# EAGLE board mach da di day (EAGLE 5.10)
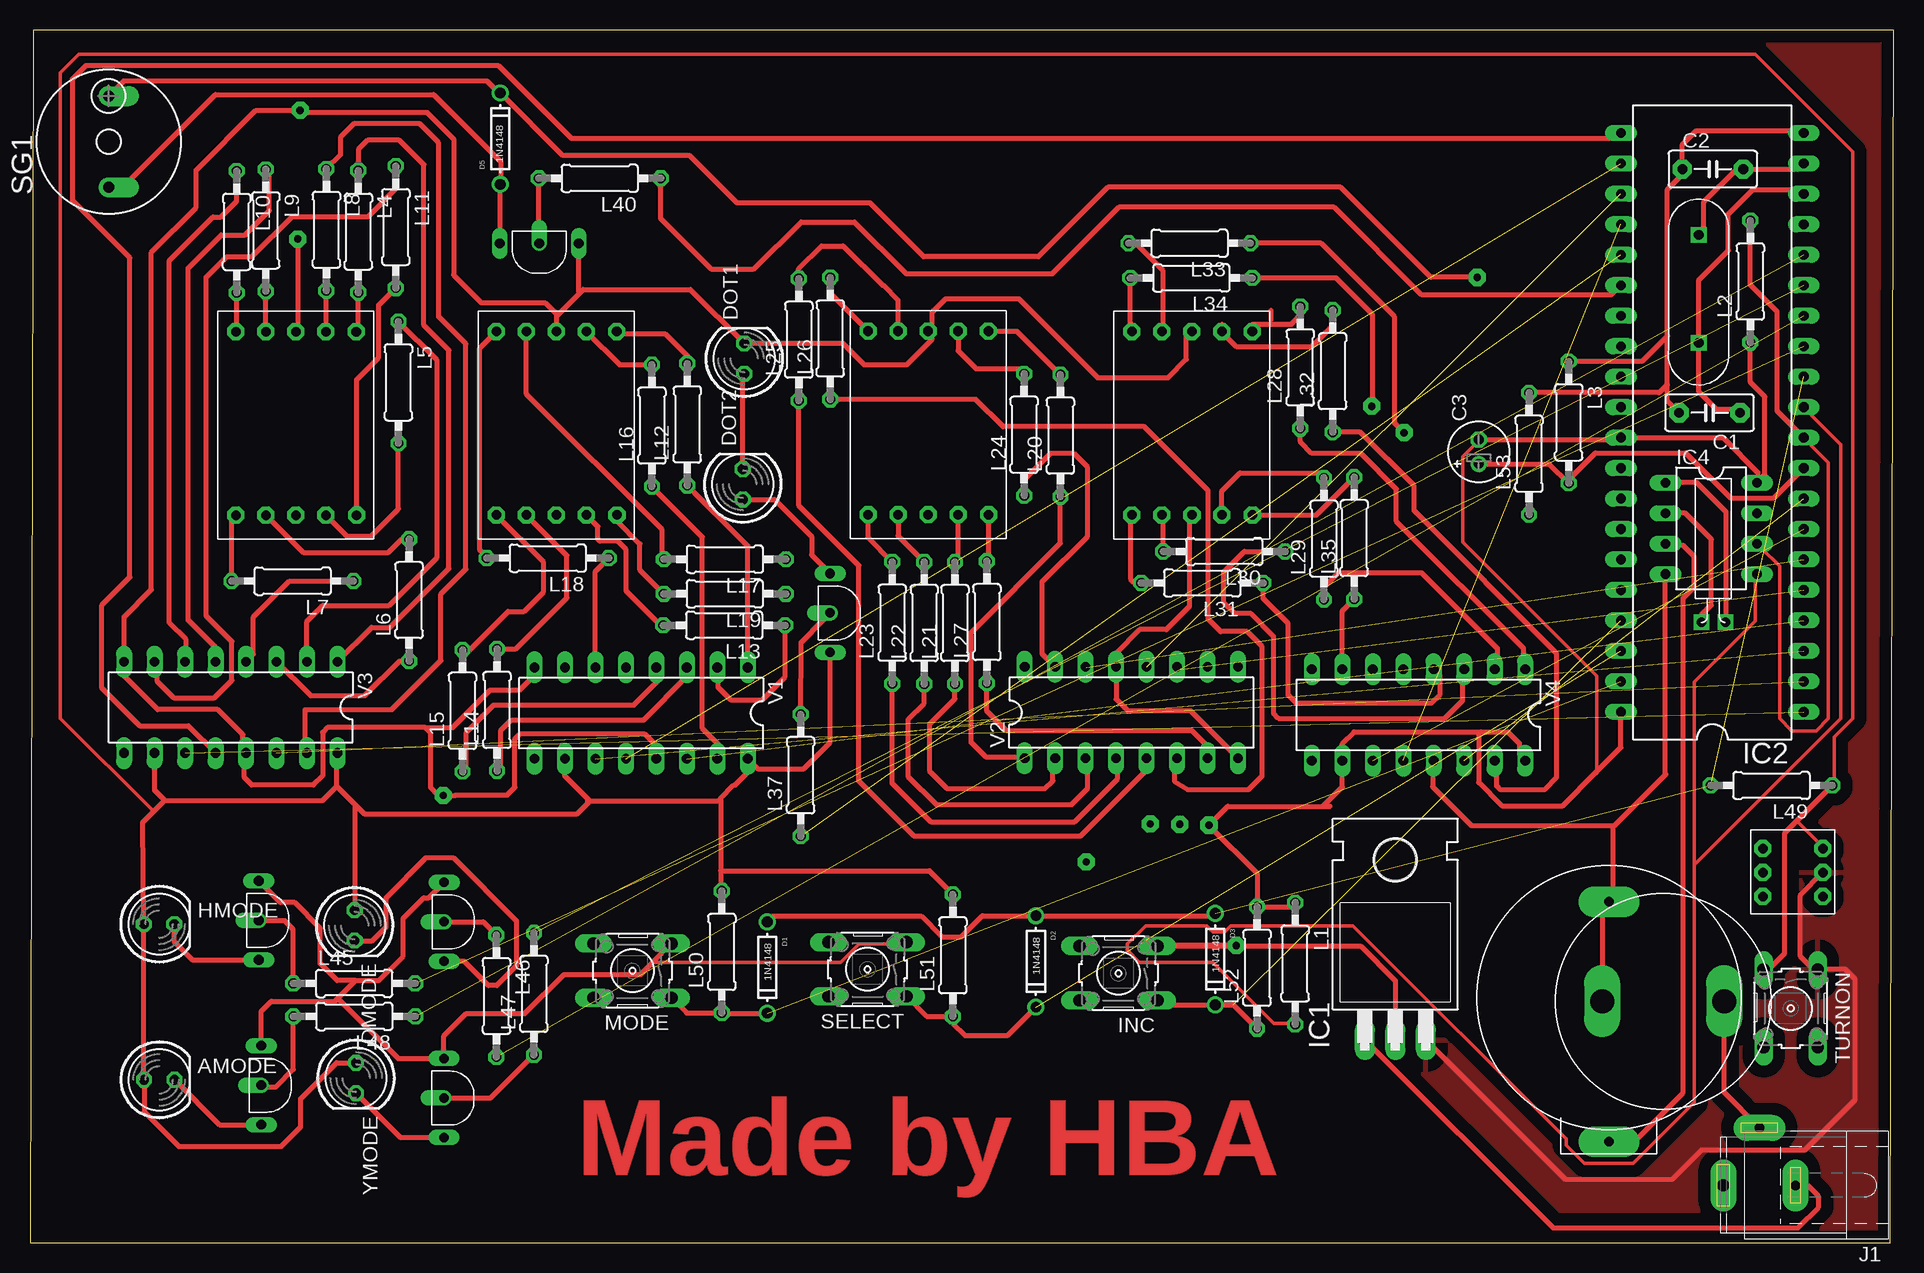
[diagram p0: board, top side]
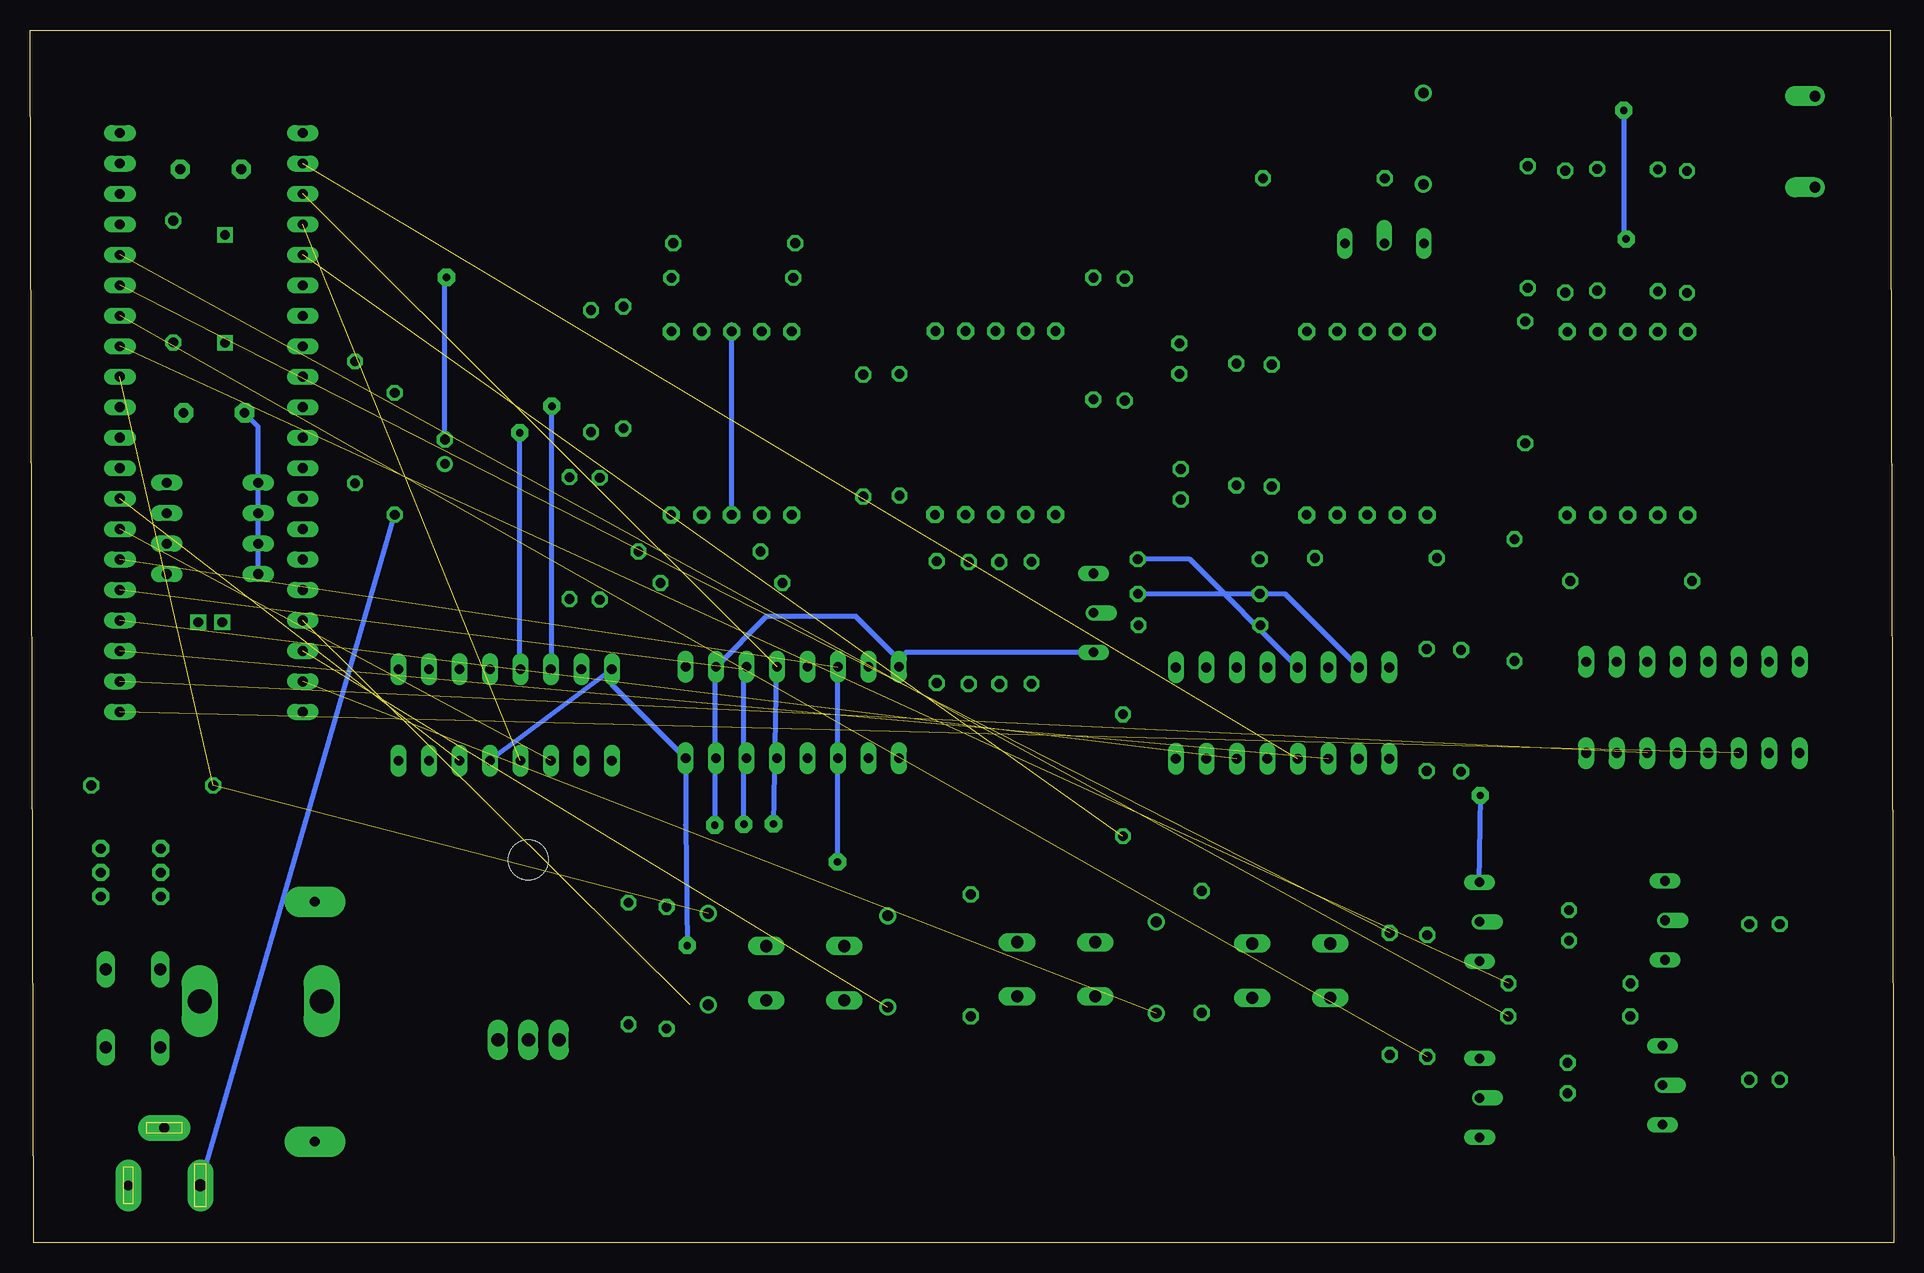
[diagram p1: board, bottom side, seen from below]

Size 155.3 x 101.09 mm. Coordinates in mm from the lower left corner, seen from the top.
Outline: 0,0 155,0 155.31,101.09 0.28,101.09 0,0
Copper layers (1*16): Top 0.035mm / dielectric 1.5mm / Bottom 0.035mm
Design rules "default *": minimum track width 11mil, minimum drill 20mil, track to track 15mil, track to pad 15mil, pad to pad 15mil, via to via 15mil, smd to smd 8mil, copper to edge 40mil, drill to drill 8mil, minimum pad ring 10mil, minimum via ring 8mil, stop-mask expansion 10mil, vias tented up to drill 0mil, thermal gap 40mil

## Footprints (pad centres in the part's own frame; a part is rotated, then mirrored left to right if it is on the bottom)
7SEG13X19 = drill 0.8 pad 1.422 octagon: P$1 5.175,7.19; P$2 2.65,7.19; P$3 0.15,7.19; P$4 -2.35,7.19; P$5 -4.85,7.19; P$6 5.201,-8.11; P$7 2.65,-8.11; P$8 0.15,-8.11; P$9 -2.35,-8.11; P$10 -4.85,-8.11
LED5MM = drill 0.813 octagon: A -1.27,0; K 1.27,0
C5B3 = drill 0.813 pad 1.6 octagon: 1 -2.54,0; 2 2.54,0
E2-5 = drill 0.813 pad 1.27 round: + -1.016,0 | drill 0.813 pad 1.27 octagon: - 1.016,0
DO-1N4148 = drill 0.9 round: A -3.81,0; C 3.81,0
TO220H = drill 1.118 long: 1 -2.54,-10.16; 2 0,-10.16; 3 2.54,-10.16 | hole 3.302: 0,4.826
DIL40 = drill 0.813 long: 1 -24.13,-7.62; 2 -21.59,-7.62; 3 -19.05,-7.62; 4 -16.51,-7.62; 5 -13.97,-7.62; 6 -11.43,-7.62; 7 -8.89,-7.62; 8 -6.35,-7.62; 9 -3.81,-7.62; 10 -1.27,-7.62; 11 1.27,-7.62; 12 3.81,-7.62; 13 6.35,-7.62; 14 8.89,-7.62; 15 11.43,-7.62; 16 13.97,-7.62; 17 16.51,-7.62; 18 19.05,-7.62; 19 21.59,-7.62; 20 24.13,-7.62; 21 24.13,7.62; 22 21.59,7.62; 23 19.05,7.62; 24 16.51,7.62; 25 13.97,7.62; 26 11.43,7.62; 27 8.89,7.62; 28 6.35,7.62; 29 3.81,7.62; 30 1.27,7.62; 31 -1.27,7.62; 32 -3.81,7.62; 33 -6.35,7.62; 34 -8.89,7.62; 35 -11.43,7.62; 36 -13.97,7.62; 37 -16.51,7.62; 38 -19.05,7.62; 39 -21.59,7.62; 40 -24.13,7.62
DIL08 = drill 0.813 long: 1 -3.81,-3.81; 2 -1.27,-3.81; 3 1.27,-3.81; 4 3.81,-3.81; 5 3.81,3.81; 6 1.27,3.81; 7 -1.27,3.81; 8 -3.81,3.81
B3F-10XX = drill 1.016 long: 1 -3.251,2.261; 2 3.251,2.261; 3 -3.251,-2.261; 4 3.251,-2.261
SPC4077 = drill 0.8 pad 2.184 long: 1 -3,0; 2 0,-4.8 | drill 1 pad 2.184 long: 3 3,0
0207/10 = drill 0.813 octagon: 1 -5.08,0; 2 5.08,0
BMT1205XH7.5 = drill 0.9 pad 1.676 offset: + 3.8,0; - -3.8,0
PINCMOS3VCR23 = drill 0.8 pad 2.54 long: P$1 0,8; P$2 0,-12
XTAL32KHZMINI = drill 0.8 square: P$1 0.5,-12; P$2 2.5,-12
XTAL12MHZ = drill 0.8 square: P$1 9.5,-2.5; P$2 0.5,-2.5
PUSKLOCKBUTTON = drill 0.8 pad 1.422 octagon: P$1 5.04,0; P$2 3.04,0; P$3 1.04,0; P$4 1.04,-5; P$5 3.04,-5; P$6 5.04,-5
C9014 = drill 0.8 long: P$1 -1.04,1; P$3 5.54,1 | drill 0.8 offset: P$2 2.25,1
9VBATERYJACK = drill 2 long: P$1 -5.08,0; P$2 5.08,0
DIL16 = drill 0.813 long: 1 -8.89,-3.81; 2 -6.35,-3.81; 3 -3.81,-3.81; 4 -1.27,-3.81; 5 1.27,-3.81; 6 3.81,-3.81; 7 6.35,-3.81; 8 8.89,-3.81; 9 8.89,3.81; 10 6.35,3.81; 11 3.81,3.81; 12 1.27,3.81; 13 -1.27,3.81; 14 -3.81,3.81; 15 -6.35,3.81; 16 -8.89,3.81

## Placement (x,y rotation side)
7SEG1  7SEG13X19 common Katot  [7SEG13X19]  22.01,68.75 0 top
7SEG2  7SEG13X19 common Katot  [7SEG13X19]  43.72,68.77 0 top
7SEG3  7SEG13X19 common Katot  [7SEG13X19]  74.69,68.79 0 top
7SEG4  7SEG13X19 common Katot  [7SEG13X19]  96.68,68.77 0 top
AMODE  Blue  [LED5MM]  10.77,13.57 0 top
C1  33p  [C5B3]  139.96,69.18 180 top
C2  33p  [C5B3]  140.24,89.49 0 top
C3  10uF  [E2-5]  120.73,65.93 90 top
D1  1N4148  [DO-1N4148]  61.45,22.94 270 top
D2  1N4148  [DO-1N4148]  83.83,23.44 270 top
D3  1N4148  [DO-1N4148]  98.77,23.63 270 top
D5  1N4148  [DO-1N4148]  39.19,92.03 90 top
DMODE  Blue  [LED5MM]  27.05,26.44 270 top
DOT1  Red  [LED5MM]  59.52,73.7 90 top
DOT2  Red  [LED5MM]  59.4,63.22 90 top
HMODE  Blue  [LED5MM]  10.76,26.55 0 top
IC1  7805T  [TO220H]  113.77,27.07 0 top
IC2  AT89C51-12PC  [DIL40]  140.2,68.37 90 top
IC4  ds1307  [DIL08]  140.1,59.54 270 top
INC  button  [B3F-10XX]  90.71,22.46 180 top
J1  jack dc  [SPC4077]  144.11,4.77 180 top
L1  10K  [0207/10]  105.43,23.27 270 top
L2  10K  [0207/10]  143.37,80.12 90 top
L3  8k2  [0207/10]  128.23,68.38 270 top
L4  450  [0207/10]  27.36,84.28 270 top
L5  450  [0207/10]  30.7,71.71 270 top
L6  450  [0207/10]  31.59,53.56 90 top
L7  450  [0207/10]  21.88,55.15 180 top
L8  450  [0207/10]  24.7,84.43 270 top
L9  450  [0207/10]  19.65,84.39 270 top
L10  450  [0207/10]  17.22,84.26 270 top
L11  450  [0207/10]  30.48,84.66 270 top
L12  450  [0207/10]  54.77,68.21 90 top
L13  450  [0207/10]  57.85,51.47 180 top
L14  450  [0207/10]  38.92,44.41 90 top
L15  450  [0207/10]  36.05,44.33 90 top
L16  450  [0207/10]  51.83,68.11 90 top
L17  450  [0207/10]  57.9,56.97 180 top
L18  450  [0207/10]  43.14,57.06 180 top
L19  450  [0207/10]  57.9,54.08 180 top
L20  450  [0207/10]  85.87,67.27 90 top
L21  450  [0207/10]  77.08,51.65 90 top
L22  450  [0207/10]  74.52,51.65 90 top
L23  450  [0207/10]  71.85,51.67 90 top
L24  450  [0207/10]  82.85,67.35 90 top
L25  450  [0207/10]  64.07,75.27 90 top
L26  450  [0207/10]  66.69,75.37 90 top
L27  450  [0207/10]  79.74,51.73 90 top
L28  450  [0207/10]  105.85,72.95 90 top
L29  450  [0207/10]  107.83,58.68 90 top
L30  450  [0207/10]  99.51,57.61 180 top
L31  450  [0207/10]  97.69,54.99 180 top
L32  450  [0207/10]  108.56,72.65 90 top
L33  450  [0207/10]  96.62,83.31 180 top
L34  450  [0207/10]  96.77,80.42 180 top
L35  450  [0207/10]  110.35,58.73 90 top
L37  180K  [0207/10]  64.22,38.96 90 top
L40  220K  [0207/10]  47.48,88.72 180 top
L45  330K  [0207/10]  27.02,21.61 0 top
L46  330K  [0207/10]  38.87,20.56 270 top
L47  330K  [0207/10]  42,20.73 90 top
L48  330K  [0207/10]  27.03,18.86 180 top
L49  10K  [0207/10]  145.12,38.11 180 top
L50  10K  [0207/10]  57.65,24.23 90 top
L51  10K  [0207/10]  76.91,23.94 90 top
L52  10K  [0207/10]  102.25,22.91 90 top
L53  15  [0207/10]  124.92,65.76 90 top
MODE  button  [B3F-10XX]  50.21,22.67 180 top
SELECT  button  [B3F-10XX]  69.79,22.78 180 top
SG1  buzzer 5V  [BMT1205XH7.5]  6.56,91.78 90 top
TURNON  button  [B3F-10XX]  146.72,19.53 270 top
U$1  PINCMOS3VCR23  [PINCMOS3VCR23]  131.57,20.41 0 top
U$2  XTAL32KHZMINI  [XTAL32KHZMINI]  138.79,63.7 0 top
U$5  XTAL12MHZ  [XTAL12MHZ]  136.56,74.5 90 top
U$7  lock button down  [PUSKLOCKBUTTON]  149.41,33.89 270 top
U$8  C9014  [C9014]  44.69,84.3 180 top
U$9  C9014  [C9014]  33.51,28.99 270 top
U$10  C9014  [C9014]  18.06,29.11 270 top
U$11  C9014  [C9014]  33.5,14.3 270 top
U$12  C9014  [C9014]  18.27,15.38 270 top
U$13  C9014  [C9014]  65.68,54.74 270 top
U$14  9V  [9VBATERYJACK]  136.09,20.11 180 top
V1  74595N  [DIL16]  50.93,44.14 180 top
V2  74595N  [DIL16]  91.78,44.19 0 top
V3  74595N  [DIL16]  16.73,44.62 180 top
V4  74595N  [DIL16]  115.71,43.99 180 top
YMODE  Blue  [LED5MM]  27.17,13.72 270 top

## Library data of the parts
7SEG1-7SEG4 = 7seg13x19
AMODE DMODE DOT1 DOT2 HMODE YMODE = led
C1 C2 = capacitor-wima
C3 = rcl
D1-D3 D5 = microbuilder
IC1 = linear
IC2 = atmel
IC4 = ic-package
INC MODE SELECT TURNON = switch-omron
J1 = con-jack
L1-L35 L37 L40 L45-L53 = resistor
SG1 = buzzer
U$1 = PINCMOS3VCR23
U$2 = Xtal32khzmini
U$5 = xtal12mhz
U$7 = pushlockbutton
U$8-U$13 = C9014
U$14 = 9vbateryjack
V1-V4 = 74ttl-din

## Nets
GND: 7SEG1.P$3 7SEG2.P$3 7SEG3.P$3 7SEG4.P$3 C1.2 C2.1 DOT1.K IC1.2 IC2.20 IC4.4 INC.3 L3.1 L53.2 MODE.3 SELECT.3 U$1.P$1 U$8.P$1 U$9.P$1 U$10.P$1 U$11.P$1 U$12.P$1 U$14.P$2 V1.8 V1.13 V2.8 V2.13 V3.8 V3.13 V4.8 V4.13
N$1: IC2.11 IC4.5 L1.2
N$2: IC2.10 IC4.6 L2.2
N$3: IC4.1 U$2.P$2
N$4: C3.+ IC2.9 L3.2
N$5: IC4.3 U$1.P$2
N$6: IC4.2 U$2.P$1
N$7: C2.2 IC2.19 U$5.P$1
N$8: C1.1 IC2.18 U$5.P$2
N$9: D1.C IC2.39 L50.1 MODE.1
N$10: IC2.25 L37.1
N$11: IC2.1 V3.11
N$12: IC2.2 V3.14
N$13: IC2.3 V1.11
N$15: IC2.5 V2.11
N$16: 7SEG1.P$4 L9.2
N$17: IC2.6 V2.14
N$18: IC2.7 V4.11
N$19: IC2.8 V4.14
N$20: L4.1 V3.1
N$21: L8.1 V3.15
N$22: 7SEG1.P$10 L7.2
N$23: L9.1 V3.5
N$24: L10.1 V3.6
N$25: 7SEG1.P$1 L4.2
N$26: L11.1 V3.7
N$27: L6.1 V3.3
N$28: L7.1 V3.4
N$29: L5.1 V3.2
N$32: 7SEG1.P$5 L10.2
N$33: IC2.4 V1.14
N$34: 7SEG1.P$6 L11.2
N$35: IC1.1 J1.1
N$36: 7SEG2.P$10 L15.2
N$37: L13.1 V1.2
N$38: L14.1 V1.3
N$39: L15.1 V1.4
N$41: L17.1 V1.5
N$42: 7SEG2.P$5 L18.2
N$43: L18.1 V1.6
N$44: L16.1 V1.15
N$45: 7SEG2.P$2 L16.2
N$47: 7SEG2.P$7 L13.2
N$48: 7SEG2.P$9 L14.2
N$51: 7SEG2.P$6 L19.2
N$53: L37.2 U$13.P$2
N$54: 7SEG3.P$10 L23.2
N$55: L27.1 V2.7
N$56: L25.1 V2.5
N$57: L26.1 V2.6
N$58: 7SEG3.P$6 L27.2
N$59: L23.1 V2.4
N$60: L21.1 V2.2
N$61: L20.1 V2.1
N$62: L24.1 V2.15
N$63: 7SEG3.P$2 L24.2
N$64: 7SEG3.P$1 L20.2
N$65: 7SEG3.P$7 L21.2
N$66: 7SEG3.P$9 L22.2
N$67: 7SEG3.P$4 L25.2
N$68: 7SEG3.P$5 L26.2
N$69: L22.1 V2.3
N$70: 7SEG4.P$10 L31.2
N$71: L35.1 V4.7
N$72: L33.1 V4.5
N$73: L34.1 V4.6
N$74: L30.1 V4.3
N$75: L31.1 V4.4
N$76: L29.1 V4.2
N$77: L28.1 V4.1
N$78: L32.1 V4.15
N$79: 7SEG4.P$2 L32.2
N$80: 7SEG4.P$1 L28.2
N$81: 7SEG4.P$7 L29.2
N$82: 7SEG4.P$9 L30.2
N$83: 7SEG4.P$4 L33.2
N$84: 7SEG4.P$5 L34.2
N$85: 7SEG4.P$6 L35.2
N$87: DOT2.A U$13.P$1
N$88: DOT1.A DOT2.K
N$89: IC2.26 L40.1
N$90: L40.2 U$8.P$2
N$91: L45.1 U$10.P$2
N$92: L46.1 U$9.P$2
N$93: L47.1 U$11.P$2
N$94: HMODE.K U$10.P$3
N$95: D5.A SG1.- U$8.P$3
N$96: D3.C IC2.37 INC.1 L52.1
N$97: L48.2 U$12.P$2
N$98: AMODE.K U$12.P$3
N$99: U$11.P$3 YMODE.K
N$101: DMODE.K U$9.P$3
N$105: IC2.13 L45.2
N$106: D1.A D2.A D3.A IC2.12 L49.2
N$107: IC2.14 L46.2
N$108: IC2.15 L47.2
N$109: IC2.16 L48.1
N$110: IC2.21 V3.12
N$111: IC2.22 V1.12
N$112: IC2.23 V2.12
N$113: IC2.24 V4.12
N$115: J1.3 L53.1
N$117: D2.C IC2.38 L51.1 SELECT.1
N$118: J1.2 U$14.P$1
N$120: 7SEG1.P$2 L8.2
N$121: 7SEG1.P$9 L6.2
N$123: 7SEG2.P$4 L17.2
N$124: 7SEG1.P$7 L5.2
N$127: L19.1 V1.7
N$128: L12.1 V1.1
N$129: 7SEG2.P$1 L12.2
VCC: AMODE.A C3.- D5.C DMODE.A HMODE.A IC2.31 IC2.40 IC4.8 L1.1 L2.1 L49.1 L50.2 L51.2 L52.2 SG1.+ TURNON.3 U$7.P$3 U$13.P$3 V1.10 V1.16 V2.10 V2.16 V3.10 V3.16 V4.10 V4.16 YMODE.A
VCCOUT: IC1.3 TURNON.1 U$7.P$2

## Tracks (layer width: path | path; a pad name or v marks a point on that pad's centre or on a via)
GND  (via drill 0.6 pad 1.42)
  Top 0.279: SELECT.3 72.64,24.89 69.09,24.89 67.56,23.37 51.82,23.37 51.86,23.33
  Top 0.406: 7SEG1.P$3 22.3,76.07 v22.3,83.67 | 7SEG2.P$3 43.87,77.22 43.97,77.32 | 43.97,77.32 45.83,79.18 | 45.83,79.18 46.1,79.45 55.04,79.45 DOT1.K 67.73,74.97 69.52,73.18 73.05,73.18 75.18,75.31 75.18,75.64 | 43.97,77.32 42.93,78.36 37.62,78.36 35.31,80.67 35.31,92 33.07,94.23 22.66,94.23 v22.5,94.39 18.82,94.39 13.84,89.41 13.84,86.28 10.11,82.55 10.11,54.43 7.84,52.16 V3.8 7.84,47.23 10.64,44.42 15.65,44.42 17.73,42.34 17.73,41.08 V3.13 17.86,40.67 17.86,38.76 18.47,38.15 23.62,38.15 24.38,38.91 24.38,42.55 24.77,42.93 32.92,42.93 | V1.8 42.04,47.3 40.79,46.05 38.35,46.05 35.23,42.93 32.92,42.93 | V1.13 52.2,41.43 51.18,42.44 40.87,42.44 40.41,41.99 40.41,37.95 39.78,37.31 35.48,37.31 35.46,37.29 v34.44,37.29 34.04,37.29 33.38,37.95 33.38,42.47 32.92,42.93 | 75.18,75.64 7SEG3.P$3 | V2.8 96.7,44.35 91.47,44.35 90.51,45.3 V2.13 90.51,49.16 92.46,51.1 94.69,51.1 96.62,53.03 96.62,60.43 v96.85,60.66 | 75.18,75.64 75.18,77.57 76.3,78.69 82.4,78.69 88.98,72.11 94.84,72.11 96.37,73.64 96.37,76.11 7SEG4.P$3 | IC2.20 147.64,92.69 138.84,92.69 137.7,91.55 C2.1 137.7,89.03 136.45,87.78 136.45,75.59 | 137.7,69.45 C1.2 136.45,70.16 136.45,71.53 | 131.88,34.77 120.12,34.77 116.89,38 116.89,40.09 V4.13 | 131.88,34.77 132.06,34.77 136.31,39.03 136.29,39.06 IC4.4 | U$8.P$1 45.73,79.29 45.83,79.18 | 136.45,71.53 136.45,75.59 | L3.1 134.32,73.46 136.45,75.59 | L53.2 135.77,70.84 136.45,71.53 | 34.39,30.15 U$9.P$1 33.23,28.75 32.82,28.75 31.09,27.03 31.09,23.88 29.06,21.84 27.13,21.84 | U$10.P$1 20.87,28.35 22.05,28.35 24.18,26.21 24.18,23.27 25.6,21.84 27.13,21.84
  Top 0.406: U$12.P$1 19.27,19.27 20.12,20.12 25.4,20.12 25.65,20.37 | 25.65,20.37 27.13,21.84 | 25.65,20.37 30.68,15.34 U$11.P$1 34.5,17.23 36.37,19.1 41.25,19.1 44.5,22.35 50.88,22.35 51.86,23.33 MODE.3 | 131.88,34.77 131.88,28.72 U$1.P$1 131.01,27.85 U$14.P$2 | IC1.2 113.77,21.82 110.88,24.72 INC.3 94,24.77 v100.53,24.77
  Bottom 0.406: v22.3,83.67 22.5,83.87 v22.5,94.39 | v96.85,60.66 96.85,76.54 7SEG4.P$3 | v100.53,24.77 100.67,34.86 V2.8 106.82,46.53 V4.8 V4.13 | U$9.P$1 34.41,37.26 v34.44,37.29 | C1.2 136.29,68.05 IC4.4
N$1
  Top 0.279: 138.68,31.5 138.68,46.74 143.76,51.82 143.76,55.37 IC4.5 | 138.68,31.5 138.68,11.68 133.6,6.6 129.54,6.6 128.02,8.13 128.02,8.64 110.24,26.42 100.08,26.42 99.57,25.91 98.55,25.91 98.04,26.42 92.96,26.42 91.44,24.89 91.44,24.38 92.46,23.37 98.55,23.37 103.63,18.29 105.16,18.29 L1.2 | 138.68,31.5 150.88,43.69 150.88,66.55 147.83,69.6 IC2.11
N$2
  Top 0.279: IC4.6 144.27,57.91 145.8,56.39 145.8,43.69 146.81,42.67 148.84,42.67 149.86,43.69 149.86,65.02 147.83,67.06 IC2.10
  Top 0.406: L2.2 143.37,79.85 145.59,77.62 145.59,69.33 IC2.10
N$3
  Top 0.406: IC4.1 138.91,63.35 141.35,60.91 141.35,51.77 U$2.P$2
N$4
  Top 0.406: IC2.9 145.33,62.08 141.73,62.08 137.97,65.84 130.45,65.84 128.22,63.61 L3.2 126.61,64.92 C3.+
N$5
  Top 0.406: IC4.3 136.44,58.12 137.77,58.12 138.68,57.2 138.68,54.66 137.77,53.75 137.77,12.5 133.68,8.41 U$1.P$2
N$6
  Top 0.406: IC4.2 137.95,60.81 140.11,58.65 140.11,53.14 139.29,52.32 U$2.P$1 139.32,51.74
N$7
  Top 0.406: IC2.19 147.34,89.49 C2.2 142.22,89.49 139.5,86.77 139.5,84.43 U$5.P$1
N$8
  Top 0.406: C1.1 142.19,69.49 140.51,69.49 139.06,70.95 U$5.P$2 139.06,80.23 141.53,82.7 141.53,85.75 143.56,87.78 147.46,87.78 IC2.18
N$9  (1 unrouted)
  Top 0.406: MODE.1 54.71,19.15 L50.1 57.68,19.13 D1.C
N$10  (1 unrouted)
N$11  (1 unrouted)
N$12  (1 unrouted)
N$13  (1 unrouted)
N$15  (via drill 0.6 pad 1.42)  (1 unrouted)
  Bottom 0.406: V2.11 95.81,47.78 v95.81,34.87
N$16
  Top 0.406: L9.2 19.65,75.95 7SEG1.P$4
N$17  (via drill 0.6 pad 1.42)  (1 unrouted)
  Bottom 0.406: V2.14 88.01,47.96 v88.01,31.73
N$18  (1 unrouted)
N$19  (1 unrouted)
N$20
  Top 0.406: V3.1 28.47,51.28 30,51.28 34.9,56.19 34.9,74.4 32.82,76.48 32.82,89.86 30.79,91.9 28.12,91.9 27.36,91.14 L4.1
N$21
  Top 0.406: L8.1 25.86,90.67 25.86,92.15 26.98,93.27 32.49,93.27 34.06,91.69 34.06,77.19 36.32,74.93 36.32,56.13 34.24,54.05 34.24,48.51 30.15,44.42 22.94,44.42 22.94,40.95 V3.15
N$22
  Top 0.406: 7SEG1.P$10 16.8,60.27 L7.2
N$23
  Top 0.406: V3.5 15.46,49.62 13.18,51.89 13.18,81.25 15.93,84 17.91,84 19.94,86.03 19.94,89.17 L9.1
N$24
  Top 0.406: L10.1 17.22,86.82 15.9,85.5 15.24,85.5 11.61,81.86 11.61,51.66 13.01,50.27 13.01,48.52 V3.6
N$25
  Top 0.406: L4.2 27.36,76.11 7SEG1.P$1
N$26
  Top 0.406: V3.7 10.62,48.19 10.62,46.76 11.96,45.41 15.37,45.41 16.82,46.86 16.82,50.11 14.68,52.25 14.68,80.49 16.38,82.19 18.49,82.19 21.84,85.55 28.17,85.55 30.48,87.86 L11.1
N$27
  Top 0.406: V3.3 23.38,45.59 27.91,45.59 30.8,48.48 L6.1
N$28
  Top 0.406: L7.1 21.62,55.15 18.62,52.15 18.62,49.05 V3.4
N$29
  Top 0.406: V3.2 23.08,51.78 24.41,53.11 29.92,53.11 33.93,57.12 33.93,73.56 L5.1
N$31
  Top 0.406: 103.43,76.91 103.43,77.72
N$32
  Top 0.406: L10.2 17.22,76 7SEG1.P$5
N$33  (1 unrouted)
N$34
  Top 0.406: 7SEG1.P$6 27.21,71.94 29.06,73.79 29.06,78.16 L11.2
N$35
  Top 0.406: IC1.1 126.92,1.22 147.32,1.22 149.05,2.95 149.05,3.86 148.14,4.77 J1.1
N$36
  Top 0.406: 38.9,60.62 7SEG2.P$10 42.8,56.73 42.8,54.25 41.17,52.63 39.85,52.63 36.64,49.41 L15.2
N$37
  Top 0.406: L13.1 62.93,47.16 61.01,45.24 58.4,45.24 57.35,46.28 57.35,47.88 V1.2
N$38
  Top 0.406: L14.1 39.24,39.65 39.24,42.7 40.11,43.56 51.13,43.56 54.79,47.22 54.79,47.9 V1.3
N$39
  Top 0.406: V1.4 52.2,46.69 50.32,44.81 38.63,44.81 36.37,42.55 36.37,39.58 L15.1
N$41
  Bottom 0.406: V1.5 58.67,56.97 L17.1
N$42
  Top 0.406: 7SEG2.P$5 37.49,74.58 37.49,57.73 38.06,57.16 L18.2
N$43
  Top 0.406: V1.6 47.12,55.96 L18.1
N$44
  Top 0.406: L16.1 56.03,58.82 56.03,42.88 57.28,41.63 V1.15
N$45
  Top 0.406: L16.2 49.14,73.19 7SEG2.P$2
N$47
  Top 0.406: 7SEG2.P$7 47.32,59.71 47.32,58.65 47.5,58.47 48.97,58.47 49.68,57.76 49.68,54.33 52.55,51.47 L13.2
N$48
  Top 0.406: L14.2 40.47,49.49 44.73,53.75 44.73,57.3 7SEG2.P$9
N$51
  Top 0.406: 7SEG2.P$6 48.92,60.15 50.83,58.24 50.83,56.08 L19.2
N$53
  Top 0.406: L37.2 64.26,50.04 65.18,50.95 65.18,50.98 U$13.P$2
N$54
  Top 0.406: 7SEG3.P$10 69.84,58.77 L23.2
N$55
  Top 0.406: L27.1 79.74,44.31 81.36,42.7 96.8,42.7 98.2,41.3 98.2,40.45 V2.7
N$56
  Top 0.406: L25.1 64.07,61.46 69.06,56.46 69.06,38.48 73.66,33.88 87.55,33.88 92.99,39.32 92.99,40.32 V2.5 93.05,41.34
N$57
  Top 0.406: L26.1 78.83,70.29 81.1,68.02 92.86,68.02 98.17,62.71 98.17,51.97 99.21,50.93 101.42,50.93 102.67,49.68 102.67,38.89 101.55,37.77 96.44,37.77 95.4,38.41 95.4,40.19 V2.6
N$58
  Top 0.406: 7SEG3.P$6 79.89,56.95 L27.2
N$59
  Top 0.406: V2.4 90.63,40.26 90.63,38.66 87.05,35.08 75.06,35.08 71.85,38.28 L23.1
N$60
  Top 0.406: L21.1 77.08,45.33 74.98,43.23 74.98,39.27 76.4,37.85 84.58,37.85 85.24,38.51 85.24,40.19 V2.2
N$61
  Top 0.406: L20.1 85.87,58.31 78.44,50.88 78.44,41.68 79.63,40.49 82.78,40.49 V2.1
N$62
  Top 0.406: L24.1 82.84,63.59 85.01,65.76 87.02,65.76 88.14,64.64 88.14,58.88 84.35,55.09 84.35,49.08 V2.15
N$63
  Top 0.406: 7SEG3.P$2 77.34,74.35 78.84,72.85 82.43,72.85 L24.2
N$64
  Top 0.406: 7SEG3.P$1 82.24,75.98 L20.2
N$65
  Top 0.406: 7SEG3.P$7 77.34,56.98 L21.2
N$66
  Top 0.406: 7SEG3.P$9 72.34,58.91 L22.2
N$67
  Top 0.406: L25.2 64.07,81.22 65.94,83.08 67.77,83.08 71.04,79.81 71.09,79.81 72.31,78.59 72.31,76.01 7SEG3.P$4
N$68
  Top 0.406: L26.2 66.69,79.13 7SEG3.P$5
N$69
  Top 0.406: L22.1 74.52,44.95 73.2,43.64 73.2,38.84 75.51,36.52 86.82,36.52 88.14,37.85 88.14,40.21 V2.3
N$70
  Top 0.406: 7SEG4.P$10 91.75,60.58 91.75,55.27 92.02,54.99 L31.2
N$71
  Top 0.406: V4.7 109.36,52.66 L35.1
N$72  (via drill 0.6 pad 1.42)
  Top 0.406: L33.1 107.59,83.31 113.72,77.19 113.72,68.3 v114.5,67.51
  Bottom 0.406: v114.5,67.51 114.5,47.86 V4.5
N$73  (via drill 0.6 pad 1.42)
  Top 0.406: L34.1 108.84,80.42 111.89,77.37 111.89,69.8 v111.81,69.72
  Bottom 0.406: v111.81,69.72 111.81,47.88 V4.6
N$74
  Top 0.406: L30.1 101.2,57.61 99.49,55.91 99.49,53.34 100.41,52.43 101.75,52.43 103.63,50.55 103.63,44.12 104.04,43.71 117.91,43.71 119.38,45.19 119.38,47.66 V4.3
N$75
  Top 0.406: L31.1 102.77,53.7 104.85,51.61 104.85,45.64 105.51,44.98 116.79,44.98 117.5,45.7 117.5,47.27 V4.4
N$76
  Top 0.406: L29.1 107.83,54.62 109.07,55.85 115.95,55.85 122.28,49.53 122.28,48.01 V4.2
N$77
  Top 0.406: L28.1 105.85,66.76 106.83,65.79 110.92,65.79 113.87,62.84 113.87,60.12 124.46,49.53 124.46,47.93 V4.1
N$78
  Top 0.406: L32.1 110.87,67.57 115.34,63.09 115.34,61.01 127.23,49.12 127.23,38.76 126.26,37.8 122.48,37.8 122.22,38.05 122.22,40.01 V4.15
N$79
  Top 0.406: L32.2 108.56,76.45 106.81,74.7 100.53,74.7 99.31,75.92 99.31,76.56 7SEG4.P$2
N$80
  Top 0.406: L28.2 105.85,77.31 105.11,76.56 101.86,76.56 7SEG4.P$1
N$81
  Top 0.406: 7SEG4.P$7 99.33,62.67 100.81,64.16 107.43,64.16 L29.2
N$82
  Top 0.406: 7SEG4.P$9 94.44,60.55 L30.2
N$83
  Top 0.406: L33.2 92.15,83.31 94.44,81.03 94.44,76.68 7SEG4.P$4
N$84
  Top 0.406: L34.2 91.69,76.7 7SEG4.P$5
N$85
  Top 0.406: L35.2 107.2,60.66 7SEG4.P$6
N$87
  Top 0.406: DOT2.A 62.06,61.95 65.13,58.88 65.13,57.34 U$13.P$1
N$88
  Top 0.406: DOT2.K 59.4,72.31 DOT1.A
N$89
  Top 0.406: L40.1 52.56,85.36 56.77,81.15 60.33,81.15 64.26,85.09 68.71,85.09 73.03,80.77 85.19,80.77 90.78,86.36 108.64,86.36 115.95,79.05 131.82,79.05 IC2.26
N$90
  Top 0.406: L40.2 42.4,83.34 U$8.P$2
N$91
  Top 0.406: L45.1 21.93,26.12 21.23,26.82 19.1,26.82 U$10.P$2
N$92
  Top 0.406: U$9.P$2 37.76,26.74 L46.1
N$93
  Top 0.406: U$11.P$2 38.39,12.05 L47.1
N$94
  Top 0.406: HMODE.K 12.03,25.05 13.51,23.57 U$10.P$3
N$95
  Top 0.406: 6.56,88.25 SG1.- 6.49,87.98 6.1,87.58 7.32,87.58 15.44,95.71 33.63,95.71 39.22,90.12 39.22,88.26 D5.A 39.15,88.18 U$8.P$3
N$96  (1 unrouted)
  Top 0.406: INC.1 94.33,19.82 D3.C 100.26,19.82 L52.1
N$97
  Top 0.406: L48.2 21.95,14.43 20.52,13.01 19.39,13.01 U$12.P$2
N$98
  Top 0.406: U$12.P$3 15.78,9.84 AMODE.K
N$99
  Top 0.406: YMODE.K 30.86,8.76 U$11.P$3
N$101
  Top 0.406: DMODE.K 28.52,25.17 29.67,26.31 29.67,28.75 33.02,32.11 35.26,32.11 40.54,26.82 40.54,23.06 38.91,21.44 38.2,21.44 36.19,23.45 U$9.P$3
N$105  (1 unrouted)
N$106  (2 unrouted)
  Top 0.406: D1.A 61.93,27.23 74.27,27.23 76,25.5 77.62,25.5 79.37,27.25 D2.A 98.58,27.25 D3.A
N$107  (1 unrouted)
N$108  (1 unrouted)
N$109  (1 unrouted)
N$110
  Top 0.406: IC2.21 132.12,92.05 45.11,92.05 39.01,98.15 4.67,98.15 3.56,97.03 3.56,86.87 8.33,82.09 8.33,55.47 5.99,53.14 5.99,46.23 9.14,43.08 13.19,43.08 V3.12
N$111  (1 unrouted)
N$112  (via drill 0.6 pad 1.42)  (1 unrouted)
  Bottom 0.406: V2.12 93.09,47.96 v93.34,34.9
N$113  (1 unrouted)
N$115
  Bottom 0.406: J1.3 L53.1
N$117  (1 unrouted)
  Top 0.406: SELECT.1 74.7,18.86 L51.1 76.91,18.29 77.93,17.27 81.47,17.27 D2.C
N$118
  Top 0.406: U$14.P$1 141.17,12.51 J1.2
N$120
  Top 0.406: L8.2 24.7,75.97 7SEG1.P$2
N$121
  Top 0.406: 7SEG1.P$9 22.77,57.53 29.87,57.53 30.98,58.64 L6.2
N$123
  Top 0.406: 7SEG2.P$4 41.37,70.75 52.68,59.44 52.68,57.58 52.82,57.44 L17.2
N$124
  Top 0.406: L5.2 30.7,61.16 28.45,58.9 26.39,58.9 7SEG1.P$7
N$127
  Bottom 0.406: V1.7 50.71,54.08 L19.1
N$128
  Top 0.406: L12.1 59.82,58.08 V1.1
N$129
  Top 0.406: L12.2 54.77,73.93 52.93,75.77 49.08,75.77 7SEG2.P$1
VCC  (via drill 0.6 pad 1.42)
  Top 0.279: U$7.P$3 149.35,33.02 147.23,35.14 | L49.1 150.37,38.61 150.37,42.16 151.89,43.69 151.89,90.93 143.76,99.06 4.06,99.06 2.54,97.54 2.54,43.69 10.3,35.93 | C3.- 120.4,66.55 119.38,65.53 119.38,58.42 130.56,47.24 130.56,39.12 130.49,39.18
  Top 0.406: V3.10 10.38,37.7 11.23,36.85 | 11.23,36.85 24.38,36.85 25.55,38.02 | 25.55,38.02 25.55,40.74 V3.16 | V1.10 44.58,38.89 46.53,36.93 | 46.53,36.93 46.63,36.83 57.33,36.83 57.54,37.05 | 57.54,37.05 58.65,38.15 58.78,38.15 59.99,39.37 59.99,40.16 V1.16 60.65,39.5 64.47,39.5 66.68,41.72 U$13.P$3 | 46.53,36.93 46.48,36.88 46.48,36.6 45.62,35.74 27.84,35.74 27.05,36.52 | 120.9,42.57 110.34,42.57 109.36,41.59 V4.10 109.36,37.98 107.75,36.37 | 120.9,42.57 123.17,42.57 124.1,41.63 124.1,40.67 V4.16 | IC2.40 132.58,41.26 130.49,39.18 127.74,36.42 122.66,36.42 120.73,38.35 120.73,42.39 120.9,42.57 | 107.75,36.37 99.82,36.37 v98.25,34.8 102.25,30.79 L52.2 105.08,27.99 L1.1 | 107.75,36.37 108.34,36.37 | L2.1 143.37,71.72 144.58,70.51 144.58,64.02 IC4.8 143.99,63.43 143.99,64.21 141.1,67.11 IC2.31 132.42,66.95 C3.- | SG1.+ 7.81,96.83 38.1,96.83 39.08,95.84 D5.C 44.4,90.63 54.97,90.63 58.93,86.67 70,86.67 74.47,82.19 84.02,82.19 89.81,87.99 109.22,87.99 116.74,80.47 v120.6,80.47 | 11.23,36.85 10.3,35.93 9.39,35.02 HMODE.A 9.49,13.59 AMODE.A 9.55,13.53 9.55,10.87 12.39,8.03 20.93,8.03 22.55,9.65 22.55,11.99 25.56,14.99 YMODE.A | 27.05,36.52 DMODE.A | 25.55,38.02 27.05,36.52 | L49.1 147.23,35.14 146.2,34.11 146.2,24.08 144.9,22.78 TURNON.3 | L50.2 57.54,29.42 57.54,30.99 | 57.54,37.05 57.54,30.99 | L51.2 74.94,30.99 57.54,30.99
  Bottom 0.406: 82.89,48.6 V2.16 | 82.89,48.6 86.49,52.2 93.93,52.2 V2.10 98.25,47.88 v98.25,34.8 | 82.89,48.6 82.29,49.2 U$13.P$3 | v120.6,80.47 120.73,80.33 C3.-
VCCOUT
  Top 0.406: U$7.P$2 147.52,28.96 147.52,23.88 148.62,22.78 TURNON.1 151.26,22.78 152.09,21.95 152.09,11.89 147.93,7.72 139.29,7.72 136.85,5.28 127.94,5.28 IC1.3
  pour Top (isolate 1.016): 0.3,101.09 154.99,101.09 154.99,0 0.3,0

## Text on the board
Top: Made by HBA
tValues: 15.5 | 8.9